# Altium PCB Rackmount_DSP.PcbDoc (part 6 of 24)
Units mil, origin at the board's own origin, x right, y up, seen from the top; angles counter-clockwise.
Board outline 10629.92 x 8267.72 mil, 4 copper layers (Top Layer, Mid Layer 1, Mid Layer 2, Bottom Layer), stack 36.2 mil thick; 4500 components, 1565 nets, 9765 pads, 3289 vias.
Unrouted connection lines stored in the file: 1.
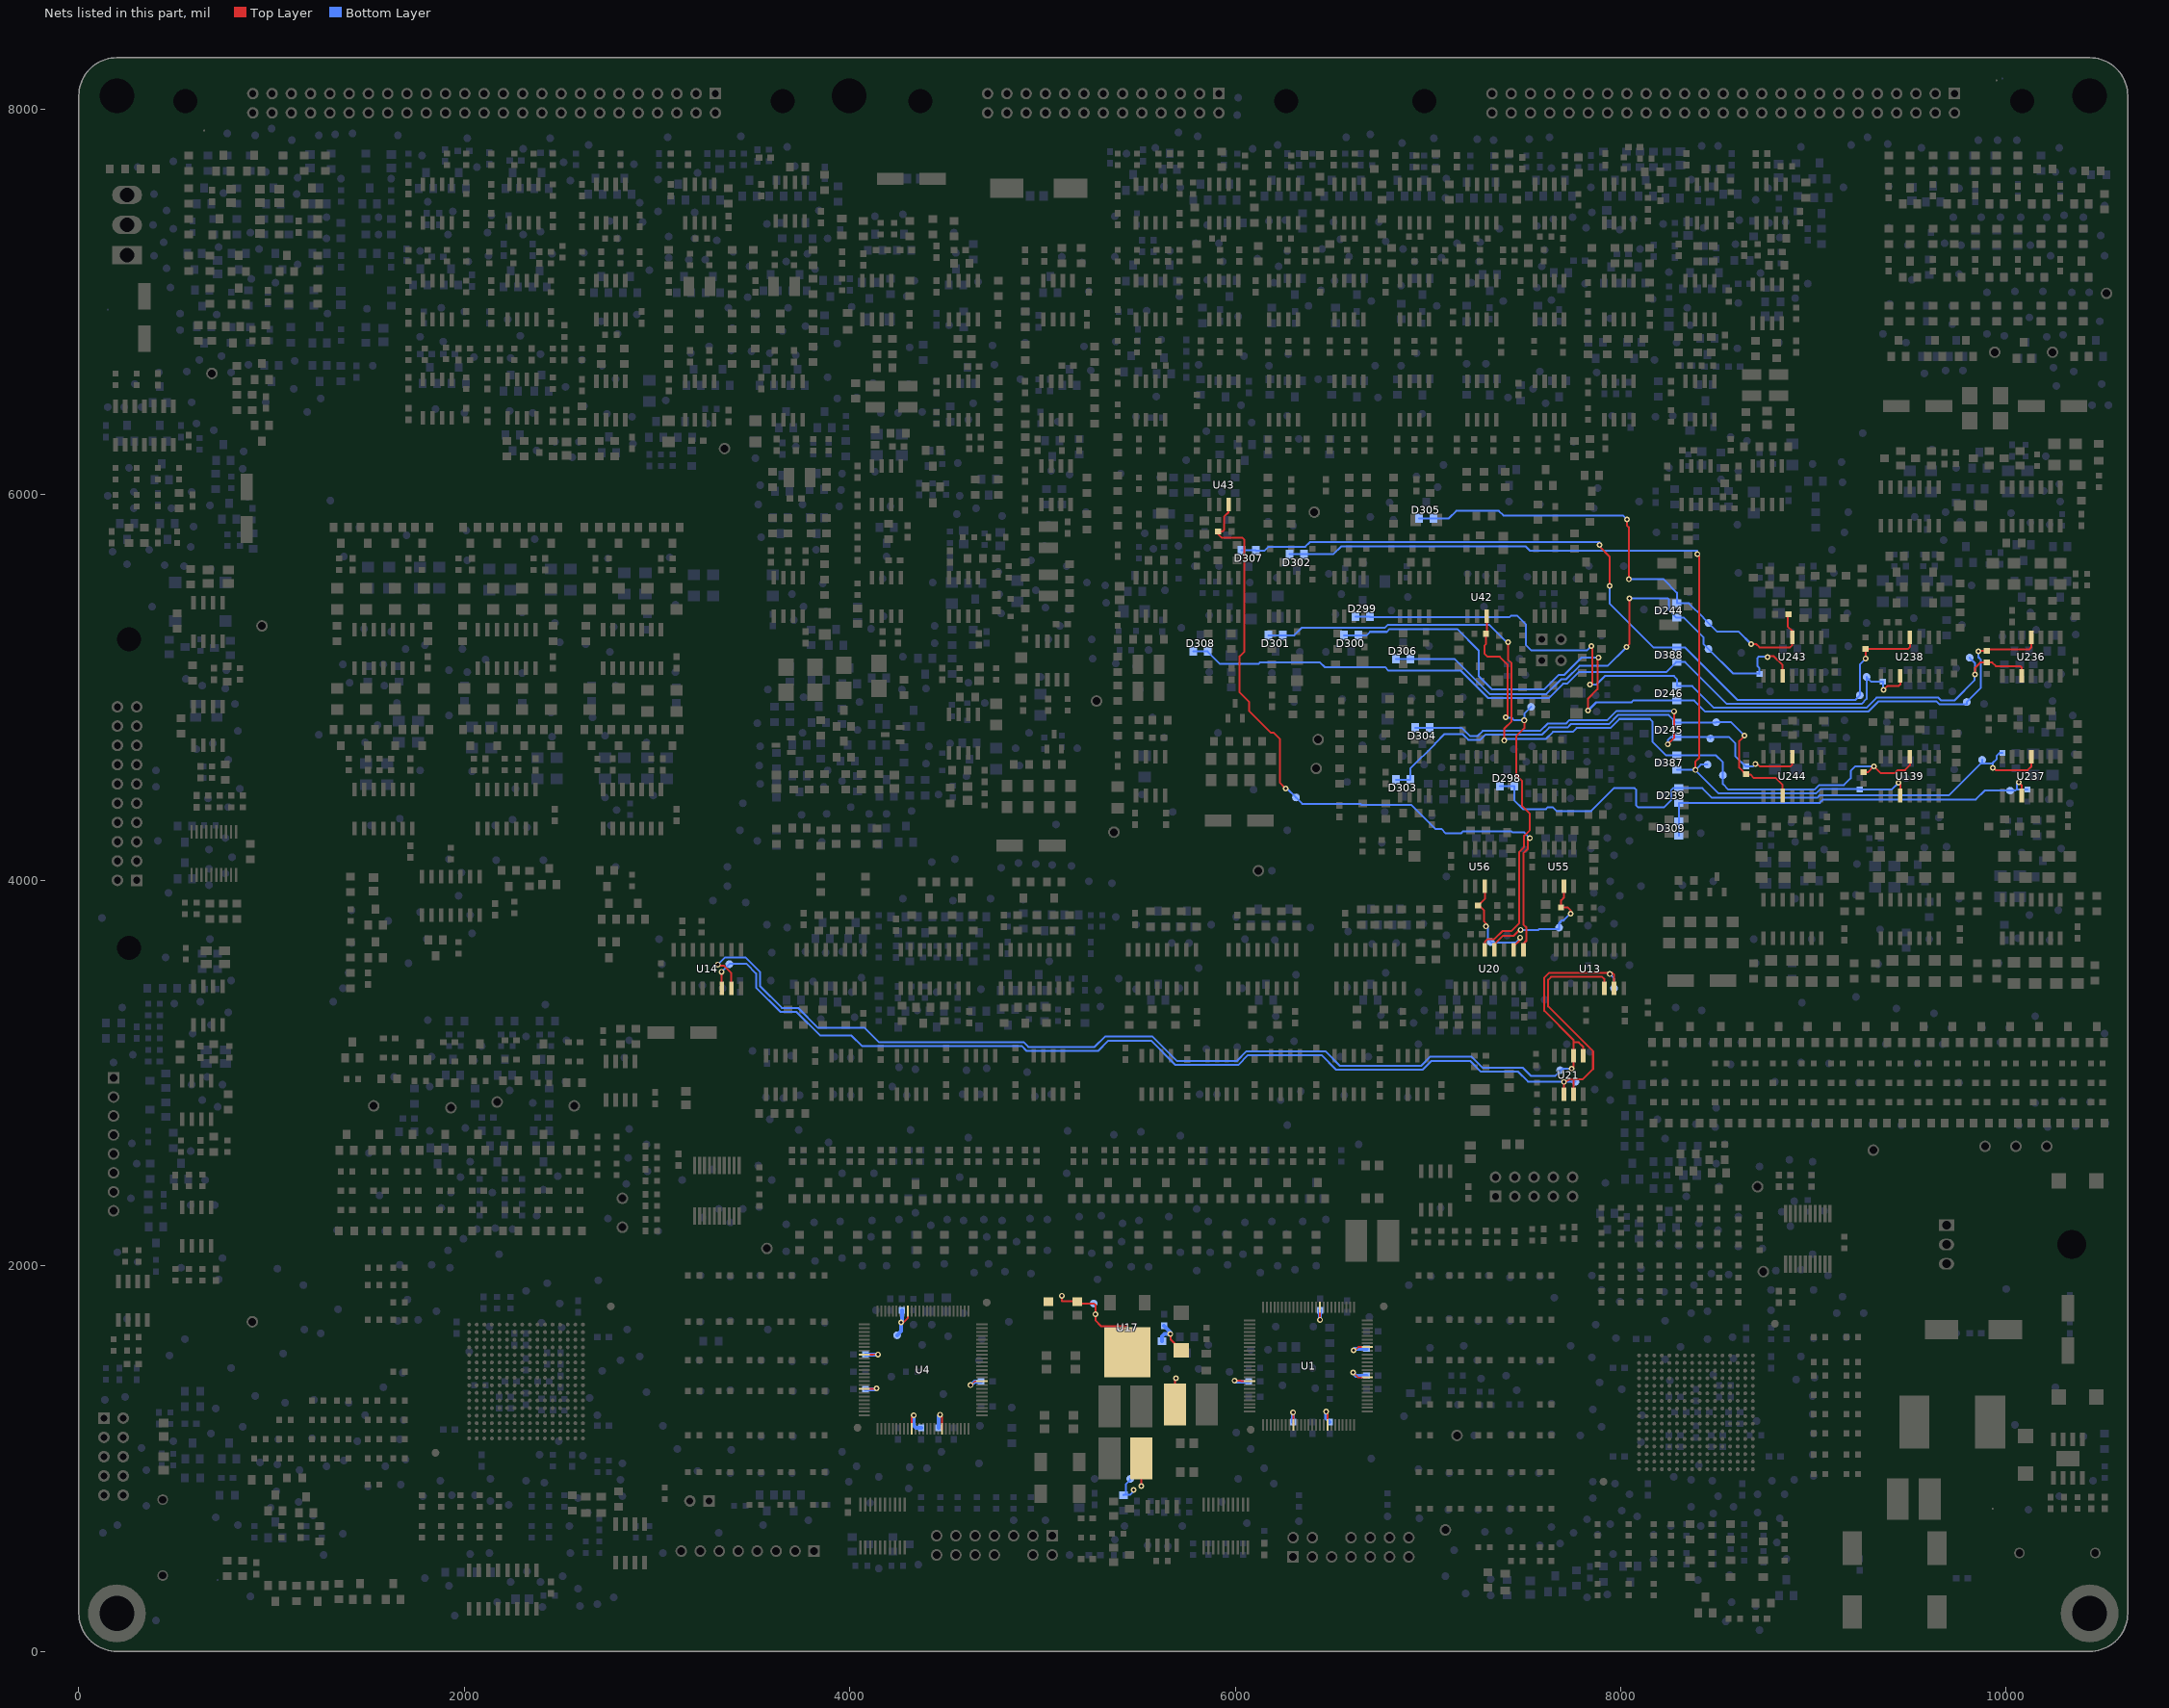
[diagram p8: the nets of this part, all layers, seen from the top]

## Part data
C1 C3 C4 C5 C6 C7 C8 C11 C13 C14 C507 C508 C509 C510 C511 C512 C513 C515 C516 C517 C518 C829 C830 C1062 C1063 C1064 C1065 C1066 C1067 C1068 C1069 C1070 C1071 C1072 C1073 C1077 C1078 C1079: ".001uF"
C17 C18 C19 C38 C330 C331 C332 C333 C334 C335 C336 C337 C338 C907 C917 C918 C955 C956 R2088 R2089: "10uF"
C20 C21 C339 C340: "2.2uF"
C22 C23 C24 C25 C27 C28 C29 C30 C31 C32 C33 C34 C35 C36 C37 C220 C224 C225 C226 C227 C228 C229 C230 C231 C232 C238 C239 C242 C243 C244 C245 C246 C248 C249 C250 C253 C255 C256 C257 C259 C260 C261 C262 C263 C264 C265 C266 C267 C268 C269 C270 C271 C272 C273 C274 C275 C279 C280 C281 C282 C284 C285 C286 C287 C289 C290 C291 C292 C293 C295 C297 C298 C299 C300 C301 C303 C304 C305 C306 C307 C308 C309 C310 C311 C312 C514 C520 C521 C522 C523 C524 C525 C526 C527 C528 C529 C530 C531 C535 C536 C537 C538 C539 C540 C541 C542 C543 C544 C545 C546 C547 C548 C549 C553 C554 C555 C556 C557 C558 C559 C560 C561 C566 C568 C571 C572 C573 C574 C576 C578 C583 C584 C585 C590 C604 C605 C606 C607 C608 C609 C610 C611 C612 C613 C614 C615 C617 C618 C619 C620 C621 C622 C623 C624 C625 C626 C627 C629 C630 C631 C632 C633 C634 C635 C636 C637 C639 C640 C641 C642 C643 C644 C645 C646 C647 C648 C649 C651 C654 C656 C657 C658 C659 C660 C661 C662 C663 C664 C665 C666 C667 C668 C669 C671 C672 C674 C675 C676 C677 C678 C679 C681 C692 C695 C704 C707 C727 C728 C730 C731 C733 C734 C735 C736 C737 C738 C740 C741 C743 C744 C745 C746 C747 C748 C750 C876 C877 C880 C881 C882 C883 C885 C886 C896 C897 C928 C929 C937 C938 C939 C940 C941 C945 C965 C966 C967 C968 C969 C970 C971 C972 C973 C974 C975 C976 C977 C978 C979 C980 C981 C982 C983 C984 C985 C986 C987 C988 C989 C990 C991 C992 C993 C994 C995 C996 C997 C998 C999 C1000 C1001 C1002 C1003 C1004 C1005 C1006 C1007 C1008 C1009 C1010 C1011 C1012 C1013 C1015 C1016 C1017 C1018 C1019 C1020 C1021 C1022 C1023 C1024 C1025 C1026 C1027 C1028 C1029 C1030 C1031 C1032 C1033 C1034 C1035 C1036 C1037 C1038 C1039 C1040 C1041 C1080 C1081 C1082 C1083 C1100 C1103 C1104 C1105 C1106 C1107 C1108 C1109 C1110 C1112 C1113 C1114 C1115 C1148 C1149 C1150 C1151 C1152 C1153 C1154 C1155 C1156 C1157 C1176 C1177: ".1uF"
C219 C313 C314 C315 C316 C317 C318 C319 C320 C321 C322 C323 C324 C326 C327 C328 C759 C1074 C1075 C1076: ".0033uF"
C241 C445 C446 C447 C448 C449 C450 C451 C452 C453 C454 C455 C456 C469 C470 C471 C478 C479 C480 C481 C482 C483 C484 C485 C486 C487 C488 C489 C490 C498 C783 C784 C785 C786 C787 C798 C799 C832 C833 C834 C835 C836 C837 C838 C839 C840 C841 C842 C843 C844 C845 C846 C847 C848 C849 C850 C851 C852 C853 C854 C855 C856 C857 C858 C859 C1050 C1051 C1052 C1174 C1175: ".01uF"
C325 C329: ".033uF"
C341 C342 C343 C344 C345 C346 C347 C348 C349 C350 C351 C352 C353 C354 C355 C356 C357 C358 C359 C360 C362 C363 C364 C368 C369 C370 C374 C375 C376 C377 C402 C403 C404 C405 C406 C407 C408 C409 C410 C411 C413 C414 C415 C416 C417 C418 C419 C420 C421 C422 C423 C424 C425 C426 C429 C430 C431 C432 C433 C434 C435 C436 C438 C439 C440 C441 C800 C801 C1043 C1084 C1101 C1116 C1117 C1118 C1119 C1120 C1121 C1122 C1123 C1124 C1125 C1126 C1127 C1128 C1129 C1130 C1131 C1132 C1158 C1159 C1160 C1161 C1162 C1163 C1164 C1165 C1166 C1167 C1168 C1169 C1170 C1171 C1172 C1173 C1178 C1200 C1201 C1202 C1203 C1204 C1205 C1206 C1207 C1208 C1209 C1210 C1211 C1212 C1213 C1214 C1215 C1216 C1217 C1218 C1219 C1220 C1221 C1222 C1223 C1224 C1225 C1226 C1227 C1228 C1229 C1230 C1231 C1232 C1233 C1234 C1235 C1236 C1237 C1238 C1239 C1240 C1241 C1242 C1243 C1244 C1245 C1246 C1247 C1248 C1249 C1250: "100pF"
C361 C427 C428: ".0022uF"
C365 C366 C367 C371 C372 C373 C1044 C1045 C1046: "68pF"
C384 C1047 C1048 C1049 C1054 C1055 C1056 C1057 C1058 C1059 C1060 C1061 C1085 C1086 C1087 C1088 C1089 C1090 C1091 C1092 C1093 C1094 C1095 C1096 C1097 C1098 C1099: "10pF"
C761 C762 C763 C764 C765 C766 C767 C768 C769 C770 C771 C806 C807 C808 C809 C810 C811 C812 C816 C817 C818 C819 C820 C821 C822 C823 C824 C825 C953 C1053 C1133 C1134 C1135 C1136 C1137 C1138 R2087: "1uF"
C772 C773: ".47uF"
C778 C911 C912 C916 C942 C943 C944 C954 C1111: "100uF"
C788 C789 C790 C791 C792 C793 C794 C795 C796 C797 C802 C803: "220pF"
C826 C827 C828: ".22uF"
C919: "33uF"
C1139 C1140 C1141: "22pF"
C1142 C1143: ".0047uF"
C1144 C1145 C1146 C1147: "220uF"
D400 D401 D402 D403 D404 D405: "100V,0.2A"
L1 L3 L4 L5 L6: "10uH"
L10: "22uH"
L11: "450uH"
R1 R2 R3 R4 R5 R6 R7 R8 R9 R10 R11 R12 R13 R14 R15 R16 R606 R607 R608 R609 R610 R611 R612 R613 R614 R615 R616 R617 R618 R619 R620 R621 R622 R623 R624 R625: "10ohms"
R17 R626: "22Kohms"
R19 R20 R21 R22 R23 R24 R25 R73 R627 R628 R629 R630 R631 R632 R633 R634 R638 R643 R644 R645 R646 R647 R648 R649 R650 R651 R652 R653 R654 R661 R662 R663 R664 R665 R666 R667 R668 R669 R670 R671 R672 R673 R674 R675 R678 R679 R681 R682 R683 R684 R685 R686 R687 R688 R689 R691 R692 R693 R694 R703 R704 R705 R708 R709 R710 R711 R712 R714 R715 R716 R717 R718 R719 R720 R721 R722 R723 R724 R725 R727 R731 R732 R739 R740 R741 R743 R744 R745 R746 R747 R748 R749 R750 R751 R752 R753 R754 R755 R756 R757 R758 R759 R1078 R1081 R1097 R1098 R1099 R1225 R1226 R1227 R1231 R1232 R1233 R1234 R1235 R1236 R1237 R1238 R1239 R1240 R1241 R1242 R1243 R1244 R1245 R1246 R1247 R1248 R1249 R1250 R1251 R1252 R1253 R1254 R1255 R1256 R1257 R1262 R1263 R1264 R1265 R1266 R1267 R1268 R1269 R1272 R1274 R1276 R1277 R1278 R1279 R1280 R1281 R1282 R1283 R1285 R1290 R1291 R1292 R1299 R1301 R1302 R1956 R1957 R1958 R1959 R1960 R1961 R1962 R1963 R1964 R1965 R1966 R1967 R1968 R1969 R2092 R2093 R2098 R2208 R2209 R2210 R2211 R2212 R2213 R2214 R2215 R2216 R2217 R2218 R2219 R2220 R2221 R2222 R2223 R2224 R2225 R2227 R2228 R2265 R2266 R2267 R2380 R2381 R2382 R2415 R2416 R2502 R2503 R2542 R2543 R2544 R2545 R2546 R2648 R2649 R2720: "4.7Kohms"
R26 R27 R28 R29 R30 R31 R32 R33 R34 R35 R36 R37 R38 R39 R40 R41 R42 R43 R44 R45 R46 R47 R48 R49 R50 R51 R52 R53 R54 R55 R56 R57 R58 R59 R60 R71 R72 R74 R605 R660 R707 R760 R761 R762 R763 R764 R765 R766 R767 R768 R769 R770 R771 R772 R773 R774 R775 R776 R777 R778 R779 R780 R781 R782 R783 R784 R785 R786 R787 R788 R789 R790 R791 R792 R793 R794 R795 R796 R797 R798 R799 R800 R801 R804 R805 R808 R809 R812 R814 R815 R818 R819 R822 R823 R826 R828 R830 R831 R832 R833 R834 R835 R836 R837 R838 R839 R840 R841 R842 R843 R844 R846 R848 R849 R851 R852 R853 R854 R855 R856 R857 R858 R859 R860 R861 R871 R872 R873 R1354 R1355 R1356 R1357 R1358 R1359 R1360 R1361 R1362 R1363 R1364 R1365 R1366 R1367 R1369 R1370 R1371 R1372 R1373 R1374 R1375 R1376 R1377 R1378 R1380 R1381 R1382 R1383 R1384 R1385 R1386 R1387 R1388 R1389 R1390 R1391 R1393 R1394 R1395 R1396 R1397 R1398 R1399 R1401 R1403 R1404 R1405 R1406 R1412 R1413 R1414 R1415 R1416 R1417 R1420 R1422 R1423 R1436 R1438 R1448 R1449 R1450 R1451 R1452 R1454 R1455 R1456 R1457 R1459 R1460 R1461 R1464 R1465 R1468 R1474 R1475 R2037 R2038 R2099 R2100 R2101 R2102 R2103 R2104 R2105 R2106 R2107 R2108 R2109 R2110 R2229 R2275 R2276 R2277 R2278 R2279 R2280 R2281 R2285 R2371 R2372 R2373 R2408 R2504 R2505 R2506 R2507 R2522 R2523 R2524 R2525 R2526 R2527 R2528 R2529 R2530 R2531 R2532 R2533 R2534 R2535 R2536 R2551 R2552 R2553 R2554 R2555 R2556 R2557 R2562 R2563 R2564 R2565 R2650 R2651 R2652 R2653 R2654 R2655 R2656 R2657 R2658 R2659 R2660 R2661 R2662 R2663 R2664 R2665 R2666 R2725 R2732 R2733: "10Kohms"
R61 R62 R63 R874 R875 R876 R877 R878 R879 R880 R881 R882 R883 R884 R885 R886 R887 R1313 R1478 R1479 R1480 R1481 R2713 R2714 R2715: "330ohms"
R70 R936 R937 R938 R939 R940 R941 R942 R943 R944 R945 R946 R947 R960 R961 R962 R963 R964 R965 R970 R971 R972 R973 R974 R975 R976 R977 R978 R979 R980 R982 R983 R1970 R1971 R1972 R1973 R1974 R1975 R1976 R1977 R1978 R1979 R1980 R1981 R1982 R1983 R2112 R2113 R2114 R2115 R2116 R2117 R2118 R2119 R2120 R2121 R2122 R2123 R2413 R2500 R2501: "2.7Kohms"
R75 R989 R990 R991 R992 R993 R994 R995 R996 R997 R998 R999 R1000 R1001 R1002 R1003 R1004 R1005 R1006 R1007 R1008 R1009 R1010 R1011 R1012 R1013 R1014 R1015 R1016 R1017 R1018 R1019 R1020 R1021 R1031 R1032 R1033 R1034 R1035 R1036 R1037 R1038 R1039 R1040 R1041 R1042 R1043 R1044 R1045 R1046 R1047 R1049 R1050 R1051 R1052 R1053 R1054 R1055 R1056 R1057 R1058 R1059 R1060 R1061 R1062 R1063 R1064 R1065 R1066 R1067 R1068 R1069 R1070 R1071 R1072 R1073 R1074 R1075 R1076 R1111 R1112 R1113 R1114 R1115 R1118 R1119 R1120 R1121 R1122 R1123 R1124 R1125 R1126 R1127 R1128 R1129 R1130 R1131 R1132 R1133 R1136 R1139 R1140 R1143 R1144 R1145 R1146 R1147 R1148 R1149 R1150 R1151 R1152 R1153 R1154 R1155 R1156 R1157 R1158 R1159 R1160 R1161 R1162 R1163 R1164 R1165 R1166 R1167 R1168 R1169 R1170 R1171 R1172 R1176 R1177 R1181 R1182 R1189 R1190 R1191 R1192 R1193 R1194 R1195 R1196 R1197 R1198 R1199 R1200 R1201 R1202 R1203 R1204 R1205 R1206 R1207 R1208 R1209 R1210 R1211 R1212 R1213 R1214 R1215 R1216 R1217 R1218 R1219 R1220 R1221 R1222 R2199 R2200 R2201 R2202 R2203 R2204 R2205 R2206 R2537 R2538 R2539 R2540 R2541 R2647 R2728 R2729 R2730 R2731 R3006 R3007 R3008: "100ohms"
R680 R2232 R2234 R2236 R2237 R2238 R2239 R2240 R2241 R2242 R2243 R2244 R2245: "11Kohms"
R802 R803 R806 R807 R810 R811 R813 R816 R817 R820 R821 R824 R825 R827 R829 R845 R847 R850 R1604 R1605 R1606 R1607 R1774 R1775 R1776 R1777 R1778 R1779: "16Kohms"
R862 R863 R865 R866 R867 R869 R870 R1307 R1309 R1311 R1312 R1596 R1597 R1598 R1599 R1600 R1601 R2026 R2027 R2264 R2271 R2511 R2726 R2727 R2736: "1Kohms"
R864 R1077 R1079 R1080 R1082 R1083 R1084 R1085 R1086 R1087 R1088 R1093 R1095 R1096 R1100 R1101 R1102 R1103 R1104 R1105 R1106 R1107 R1108 R1109 R1110 R2094 R2095 R2096 R2097 R2343 R2344 R2347 R2348 R2349 R2350 R2351 R2352 R2353 R2354 R2414 R2667 R2668 R2669 R2670 R2671 R2672 R2673 R2674 R2675 R2676 R2677 R2678 R2679 R2680 R2681 R2682 R2683 R2684 R2685 R2686 R2687 R2688 R2689 R2690 R2691 R2692 R2693 R2694 R2695 R2696 R2697 R2698 R2699 R2700 R2701 R2702 R2703 R2704 R2705 R2706 R2707 R2708: "2Kohms"
R888 R889 R890 R903 R904 R905 R906 R907 R908 R909 R910 R911 R912 R914 R915 R916 R917 R918 R919 R920 R921 R922 R923 R924 R925 R927 R928 R929 R930 R931 R932 R933: "200ohms"
R891 R892 R893 R894 R895 R896 R897 R898 R899 R900 R901 R902 R913 R926 R2111 R2709 R2710 R2711 R2712 R3011 R3012 R3013 R3014: "33ohms"
R984 R988 R1350 R1351 R1352 R1353 R2069 R2516 R2518 R2519 R2716 R2717 R2718 R2719 R3009 R3010 R3015 R3016: "0ohms"
R1048 R1608 R1611 R1612 R1613 R1614 R1615 R1616 R1617 R1618 R1619 R1620 R1621 R1622 R1627 R1628 R1629 R1630 R1631 R1632 R1633 R1634 R1635 R1636 R1637 R1638 R1639 R1640 R1641 R1642 R1643 R1644 R1645 R1646 R1658 R2336 R2337 R2338 R2339 R2340 R2341 R2510 R2512 R2513 R2644 R2645 R2646 R2734 R2735: "1Mohms"
R1314 R1315 R1316 R1317 R1948 R1949 R1950 R1951 R1952 R1953 R1954 R1955 R1987 R1988 R1989 R1990 R2324 R2325 R2326 R2327 R2328 R2329 R2330 R2331 R2332 R2333 R2334 R2335 R2566 R2567 R2568 R2569 R2570 R2571 R2572 R2573: "27Kohms"
R1318 R1319 R1320 R1497 R1498 R1499 R1500 R1501 R1502 R1503 R1522 R1523 R1535 R1536 R1537 R1538 R1546 R1547 R1548 R1549 R1564 R1567 R1568 R1569 R1570 R1571 R1575 R1576 R1577 R1578 R1579 R1668 R1669 R1670 R1671 R1672 R1674 R1675 R1676 R1677 R1678 R1679 R1680 R1681 R1682 R1683 R1684 R1685 R1686 R1687 R1690 R1691 R1692 R1694 R1695 R1696 R2230 R2231 R2233 R2235 R2246 R2247 R2248 R2249 R2250 R2251 R2252 R2253 R2254 R2255 R2256 R2257 R2258 R2259 R2260 R2261 R2262 R2263 R2268 R2269 R2270 R2272 R2273 R2274 R2547 R2548 R2549 R2550: "20Kohms"
R1345: "62Kohms"
R1346 R1348 R1349 R2621 R2622 R2623 R2624 R2625 R2626 R2627 R2628 R2629: "510ohms"
R1402: "30Kohms"
R1424 R1425 R1426 R1427 R1428 R1429 R1430 R1432 R1433 R1434 R1439 R1440 R1441 R1442 R1443 R1444 R1445 R1446 R1447 R1492 R1493 R1494 R1602 R1603 R1812 R1813 R1814 R2054 R2055 R2056 R2078 R2289 R2499: "15Kohms"
R1453 R1458 R1864 R1865 R1866 R1867 R1868 R1869 R1870 R1871 R1872 R1873 R1874 R1875 R1876 R1877 R1878 R1879 R1882 R1896 R1897 R1898 R1899 R1900 R1901 R1902 R1903 R1904 R1905 R1906 R1907 R1908 R1909 R1910 R1911 R1912 R1913 R1914 R1915 R1916 R1919 R1920 R1921 R1924 R2313 R2314 R2315 R2316 R2317 R2318 R2319 R2320 R2321 R2322: "3.3Kohms"
R1482 R1483 R1484 R1485 R1486 R1487 R1488 R1489 R1490 R1491 R2521: "47Kohms"
R1623 R1624 R1647 R1648 R1649 R1650 R1651 R1652 R1653 R1654 R1655 R1656 R2592 R2593 R2594 R2595 R2596 R2597 R2598 R2599 R2600 R2601 R2602 R2603 R2604 R2605 R2606 R2607 R2608: "10Mohms"
R1661: "5.6Kohms"
R1697: "63.4Kohms"
R1701 R1719 R1723 R1724 R1728 R1743 R1841 R1842 R1843 R1844 R1845 R1846 R1847 R1848 R1849 R1850 R1851 R1852 R2063 R2064 R2065 R2066 R2067 R2068 R2294 R2295 R2296 R2297 R2298 R2299 R2300 R2301 R2302 R2303 R2304 R2305 R2306 R2307 R2308 R2309 R2310 R2311 R2312 R2342 R2508 R2509 R2558 R2559 R2560 R2561 R2609 R2610 R2611: "51Kohms"
R1819 R1820 R1821 R1822 R1823 R1824 R1825 R1826 R1827 R1828 R1829 R1830 R1831 R1832 R1833 R1834 R1835 R1836 R1837 R1838 R1839 R1840 R1946 R2323 R2355 R2356: "100Kohms"
R1853 R1854 R1855 R1856 R1857 R1858: "470Kohms"
R1859 R1860 R1861: "39Kohms"
R1938: "18Kohms"
R2041 R2042 R2043 R2396 R2397 R2398 R2399 R2404 R2405 R2406 R2407 R2409: "75Kohms"
R2081 R2082 R2377 R2378: "820Kohms"
R2083: "300Kohms"
R2287 R2288 R2290 R2291 R2292 R2293: "25.5Kohms"
R2374 R2375 R2376: "7.5Kohms"
R2379 R3000 R3001 R3002: "24Kohms"
R2383: "240Kohms"
R2384 R2385 R2386 R2387 R2388 R2389 R2390 R2391 R2392 R2393 R2394 R2395: "160Kohms"
R2520: "6.2Kohms"
R2574 R2575 R2576 R2577 R2578 R2579 R2580 R2581 R2582: "3.01Kohms"
R2583 R2584 R2585 R2586 R2587 R2588 R2589 R2590 R2591: "750ohms"
R2612 R2613 R2614 R2615 R2616 R2617 R2618 R2619 R2620: "820ohms"
R2721 R2722 R2723 R2724: "1.5Kohms"
R3003 R3004 R3005: "150Kohms"
U7 U9 U27 U163 U164: "AZ431AN"
U17: "LM1117-1.8"
Y1: "20MHz"

## Free pads (board coordinates)
  round 10 smd far side paste-5.5 mask-5.5: ""(150,6960) ""(720,370) ""(9980,8160)
  round 300 hole 180 paste-5000 mask+2.5: ""(196.85,196.85) ""(10433.07,196.85)
  round 140 hole 180 unplated paste-5000 mask+22.5: ""(196.85,8070.87) ""(3996.06,8070.87) ""(10433.07,8070.87)
  round 10 smd paste-5.5 mask-5.5: ""(650,7890) ""(9930,740) ""(9950,8150)
  round 40 smd paste+0 mask+20: ""(1850,1030) ""(2760,1790) ""(4040,1160) ""(4710,1810) ""(6080,1150) ""(6770,1790) ""(7910,880) ""(8800,1700)

## Via types
v1: diameter 30, hole 16, Top Layer to Bottom Layer, 3143 vias
v2: diameter 22, hole 12, Top Layer to Bottom Layer, 146 vias

## Nets (pads, with @x,y where several pads share a name; then routed paths per layer and width w, separated by ;. In a path a pad name is that pad's centre, name@x,y a point inside that pad or via, vN(x,y) a via of type N, cw(c..) or ccw(c..) an arc to the next point about the centre after c; other vN are vias at no path point)
1REC_OC_A+: D246.2 D300.1 D300.2 R1829.2 TP142.1 U236.4 | length 4594.2
  Top Layer w10: v1(7830,4880.64) 7830,4941.85 7879.49,4991.34 7879.49,5150.75 v1(7883.74,5155) ; v1(9855.48,5188.05) 9857.43,5190 R1829.2@9900,5190 9900,5197.42 10119.22,5197.42 10130,5208.2 U236.4@10130,5260
  Bottom Layer w10: D300.1@6562.5,5271.5 D300.2@6637.5,5271.5 6681.81,5271.5 6699.44,5289.13 6786.6,5289.13 6800.6,5303.13 7151.46,5303.13 7262.98,5191.62 7262.98,5060.38 7332.94,4990.42 7601.97,4990.42 7676.62,5065.07 7705.03,5065.07 7794.96,5155 v1(7883.74,5155) ; v1(7830,4880.64) 7830,4880.76 7872.37,4923.13 8055.06,4923.13 8064.43,4932.5 D246.2@8291.5,4932.5 8381.07,4932.5 8438.21,4875.36 9283.5,4875.36 9335.82,4927.68 9638.85,4927.68 9653.98,4912.55 9795,4912.55 TP142.1@9795,4925 9868.74,4998.73 9868.74,5144.79 9855.48,5158.05 v1(9855.48,5188.05)
1REC_OC_A-: D246.1 D299.1 D299.2 R1830.2 TP141.1 U236.10 | length 4245.7
  Top Layer w10: v1(7840.53,5015.51) 7853.53,5015.51 7853.53,5215.51 v1(7847.2,5215.51) ; v1(9837.84,5067.84) 9837.84,5102.54 9865.29,5130 R1830.2@9900,5130 9927.1,5130 9946.28,5110.82 10073.68,5110.82 10079.1,5105.4 10079.1,5060 U236.10@10080,5060
  Bottom Layer w10: D299.2@6622.5,5368.5 D299.1@6697.5,5368.5 6697.5,5365 7422.6,5365 7430.07,5372.47 7463.51,5372.47 7508.75,5327.23 7508.75,5219.5 7536.08,5192.16 7823.86,5192.16 v1(7847.2,5215.51) ; v1(7840.53,5015.51) 7873.3,5015.51 7917.29,5059.51 8276.33,5059.51 8291.5,5044.34 D246.1@8291.5,5007.5 8370.98,5007.5 8483.11,4895.36 9273.91,4895.36 9326.23,4947.68 9648.03,4947.68 9662.55,4933.16 9731.31,4933.16 9836.49,5038.34 9836.49,5066.49 v1(9837.84,5067.84) 9837.84,5127.16 TP141.1@9810,5155
1REC_OC_B+: D239.2 D309.1 D309.2 R1831.2 TP140.1 U237.10 | length 2129.5
  Top Layer w10: v1(10065,4508.03) 10080,4493.03 U237.10@10080,4440
  Bottom Layer w10: D309.2@8301.5,4232.5 D309.1@8301.5,4307.5 D239.2@8301.5,4402.5 9032.99,4402.5 9050.49,4420 9842.68,4420 9887.68,4465 TP140.1@10020,4465 10046.36,4465 10056.3,4474.94 ; v1(10065,4508.03) 10056.3,4508.03 10056.3,4474.94 ; R1831.2@10110,4470 10056.3,4470 10056.3,4474.94
1REC_OC_B-: D239.1 D298.1 D298.2 R1832.2 TP139.1 U237.4 | length 3354.9
  Top Layer w10: v1(9930.27,4584.16) 9932.1,4585.99 9945.91,4572.18 10112.18,4572.18 10130,4590 U237.4@10130,4640
  Bottom Layer w10: D298.2@7372.5,4488.5 D298.1@7447.5,4488.5 7447.5,4414.5 7492.64,4369.36 7611.46,4369.36 7622.1,4380 7646.95,4380 7666.93,4360.03 7846.48,4360.03 7963.96,4477.5 8071.65,4477.5 8080.12,4469.02 8080.12,4388.4 8090.63,4377.89 8223.11,4377.89 8261.03,4415.81 8261.03,4467.33 8271.2,4477.5 D239.1@8301.5,4477.5 8423.54,4477.5 8473.04,4427.99 9019.06,4427.99 9031.07,4440 9701.92,4440 9866.89,4604.97 9875,4604.97 ; TP139.1@9875,4625 9875,4604.97 ; v1(9930.27,4584.16) 9930.27,4604.97 ; R1832.2@9980,4660 9964.2,4660 9951.42,4647.21 9951.42,4630.39 9930.27,4609.25 9930.27,4604.97 ; 9875,4604.97 9930.27,4604.97
1REC_OC_C+: D308.1 D308.2 D388.2 R1837.2 TP138.1 U238.10 | length 4173.2
  Top Layer w10: v1(9363.67,4988.66) 9383.98,5008.97 9442.45,5008.97 9450,5016.52 U238.10@9450,5060
  Bottom Layer w10: D308.2@5782.5,5188.5 D308.1@5857.5,5188.5 5857.5,5185 5920,5122.5 6119.26,5122.5 6126.93,5130.17 6439.5,5130.17 6463.91,5105.77 6777.47,5105.77 6795.74,5087.5 7170.48,5087.5 7312.95,4945.03 7625.55,4945.03 7700.8,5020.27 7722.1,5020.27 7783.63,5081.8 8237.3,5081.8 8288,5132.5 D388.2@8291.5,5132.5 8333.15,5132.5 8550.29,4915.36 9248.76,4915.36 9275,4941.61 TP138.1@9275,5055 9300,5030 R1837.2@9360,5030 9360,4992.34 v1(9363.67,4988.66)
1REC_OC_C-: D307.1 D307.2 D388.1 R1838.2 TP137.1 U238.4 | length 4269.2
  Top Layer w10: v1(7890.16,5739.19) 7890.16,5731.61 7941.72,5680.05 v1(7941.72,5527.68) ; v1(9270,5150.02) R1838.2@9270,5200 9490,5200 9500,5210 U238.4@9500,5260
  Bottom Layer w10: D307.1@6032.5,5711.5 D307.2@6107.5,5711.5 6107.5,5710.55 6152.06,5710.55 6172.4,5730.88 6362.72,5730.88 6386.5,5754.66 7890.16,5754.66 v1(7890.16,5739.19) ; v1(7941.72,5527.68) 7941.72,5436.71 8170.92,5207.5 D388.1@8291.5,5207.5 8334.51,5207.5 8606.65,4935.36 9215.88,4935.36 9240,4959.48 TP137.1@9240,4960 9240,5120.02 v1(9270,5150.02)
1st_PFC_I+_DISCHG: R1546.2 TP537.1 U20.5 U42.7 | length 2190.8
  Top Layer w10: U20.5@7295,3640 7295,3679.78 7310.22,3695 7343.59,3695 7385.26,3736.68 7431.64,3736.68 7471.71,3776.75 7471.71,4145.15 7498.73,4172.16 7498.73,4231.04 7527.92,4260.24 7527.92,4345.79 7486.78,4386.93 7486.78,4516.21 7459,4544 7459,4749.45 7499,4789.45 v1(7499,4830) ; U42.7@7305,5370 7305,5285.39 7300,5280.39 R1546.2@7300,5280 7300,5224.81 7292.04,5216.85 7292.04,5176.81 7309.55,5159.31 7372.43,5159.31 7411.63,5120.1 7411.63,4845.59 v1(7403.39,4845.59)
  Bottom Layer w10: v1(7403.39,4845.59) 7403.39,4843.63 7433.39,4843.63 7447.02,4830 v1(7499,4830) 7499,4864 TP537.1@7535,4900
1st_PFC_I-_DISCHG: R1547.2 TP1679.1 U20.1 U43.7 | length 3736.9
  Top Layer w10: R1547.2@5910,5810 R1547.2@5911,5810 ; U43.7@5965,5950 5965,5909.77 5942.89,5887.66 5942.89,5819.14 5933.75,5810 R1547.2@5911,5810 ; v1(6261.33,4476.21) 6231.2,4506.34 6231.2,4733.81 6198.22,4766.78 6183.65,4766.78 6072.5,4877.93 6072.5,4924.86 6022.05,4975.31 6022.05,5162.04 6047.5,5187.49 6047.5,5766.21 6037.46,5776.25 5931.22,5776.25 5911,5796.47 R1547.2@5911,5810 ; U20.1@7495,3640 7495,3671.72 7510.34,3687.06 7510.34,3755.37 7495,3770.71 7495,4140.15 7518.73,4163.88 7518.73,4209.12 7528.32,4218.71 v1(7528.82,4218.71)
  Bottom Layer w10: v1(6261.33,4476.21) 6268.79,4476.21 TP1679.1@6315,4430 6347.53,4397.47 6649.16,4397.47 6654.49,4392.14 6912.61,4392.14 7037.72,4267.04 7068.63,4267.04 7092.27,4243.4 7170.65,4243.4 7182.25,4255 7431.08,4255 7438.01,4248.06 7499.47,4248.06 v1(7528.82,4218.71)
2nd_PFC_I+_DISCHG: R2548.2 TP1680.1 U20.4 U55.7 | length 704.8
  Top Layer w10: U20.4@7345,3640 7345,3667.68 7390.19,3712.87 7445.17,3712.87 7475.25,3742.95 v1(7480.33,3742.95) ; R2548.2@7690,3860 R2548.2@7690.44,3860 ; U55.7@7705,3970 7705,3910.36 7690.44,3895.8 R2548.2@7690.44,3860 ; v1(7740.51,3827.5) 7740.51,3843.86 7724.37,3860 R2548.2@7690.44,3860
  Bottom Layer w10: v1(7480.33,3742.95) 7571.71,3742.95 7576,3747.25 7680,3747.25 TP1680.1@7680,3755 7680,3778.3 7687.63,3785.93 ; 7687.63,3778.3 7687.63,3785.93 ; v1(7740.51,3827.5) 7739.29,3827.5 7704.8,3793 7694.7,3793 7687.63,3785.93
2nd_PFC_I-_DISCHG: R2550.2 TP1681.1 U20.2 U56.7 | length 587.4
  Top Layer w10: R2550.2@7260,3870 R2550.2@7261,3870 ; U56.7@7295,3970 7295,3904 R2550.2@7261,3870 ; v1(7300.81,3761) 7304.12,3761 7304.12,3772.83 7291.13,3785.82 7291.13,3842.95 7264.09,3870 R2550.2@7261,3870 ; U20.2@7445,3640 7445,3657.82 7477.67,3690.49 v1(7477.67,3702.95)
  Bottom Layer w10: v1(7300.81,3761) 7311.61,3761 7311.61,3696.34 7325,3682.95 TP1681.1@7325,3680 7327.01,3677.99 7457.3,3677.99 7477.67,3698.37 v1(7477.67,3702.95)
2REC_OC_A+: D302.1 D302.2 D387.2 R1833.2 TP133.1 U139.10 | length 4663.8
  Top Layer w10: v1(8387.59,4572.5) 8387.59,4616.24 8407.5,4636.16 8407.5,5681.74 8400.02,5689.21 8398.42,5690.82 8398.42,5692.13 v1(8397.58,5692.13) ; v1(9440.61,4505.75) 9450,4496.36 U139.10@9450,4440
  Bottom Layer w10: D302.1@6282.5,5691.5 D302.2@6357.5,5691.5 6508.18,5691.5 6549.18,5732.5 7506.83,5732.5 7530.14,5709.19 8397.58,5709.19 v1(8397.58,5692.13) ; D387.2@8291.5,4572.5 v1(8387.59,4572.5) ; TP133.1@8450,4600 8415.09,4600 v1(8387.59,4572.5) ; v1(9440.61,4505.75) 9404.87,4470 R1833.2@9240,4470 9240,4474.18 9036.96,4474.18 9013.54,4450.76 8507.77,4450.76 8387.59,4570.94 v1(8387.59,4572.5)
2REC_OC_A-: D301.1 D301.2 D387.1 R1834.2 TP132.1 U139.4 | length 4491.6
  Top Layer w10: v1(7395.37,4724.79) 7395.37,4787.16 7433.39,4825.19 7433.39,4997.67 7431.63,4999.43 7431.63,5128.39 7414.94,5145.08 7414.94,5228.9 7414.94,5234.51 v1(7415.19,5234.76) ; R1834.2@9260,4560 9281.66,4560 v1(9312.95,4591.28) 9347.37,4556.87 9421.3,4556.87 9436.29,4571.86 9475.49,4571.86 9500,4596.36 U139.4@9500,4640
  Bottom Layer w10: D301.1@6172.5,5271.5 D301.2@6247.5,5271.5 6305.38,5271.5 6343.88,5310 6775.57,5310 6790.46,5324.9 7318.94,5324.9 7414.94,5228.9 7415.19,5229.15 v1(7415.19,5234.76) ; v1(7395.37,4724.79) 7395.37,4733.5 7611.4,4733.5 7648.38,4770.48 7750.98,4770.48 7770.42,4789.92 7945.84,4789.92 7993.01,4837.09 8151.04,4837.09 8165,4823.13 8165,4717.85 8235.35,4647.5 D387.1@8291.5,4647.5 8494.38,4647.5 8530.37,4611.51 TP132.1@8530.37,4545 ; TP132.1@8530,4545 TP132.1@8530.37,4545 ; v1(9312.95,4591.28) 9216.62,4591.28 9192.48,4567.15 9192.48,4529.73 9157.6,4494.84 9116.31,4494.84 9115.87,4494.41 9028.9,4494.41 9005.25,4470.76 8777.57,4470.76 8558.72,4470.76 8530.37,4499.11 TP132.1@8530.37,4545
2REC_OC_B+: D244.2 D306.1 D306.2 R1827.2 TP131.1 U243.10 | length 2826.4
  Top Layer w10: v1(8030.26,5210.52) 8044.01,5224.27 v1(8044.01,5463.33) ; v1(8760.8,5158.43) 8760.8,5162.88 8792.86,5162.88 8840,5115.75 U243.10@8840,5060
  Bottom Layer w10: D306.2@6832.5,5148.5 D306.1@6907.5,5148.5 7137.86,5148.5 7319.58,4966.78 7614.47,4966.78 7690.92,5043.24 7716.36,5043.24 7785.25,5112.13 7931.87,5112.13 v1(8030.26,5210.52) ; v1(8044.01,5463.33) 8243.47,5463.33 8250,5456.8 8250,5400.5 8288,5362.5 D244.2@8291.5,5362.5 8327.78,5362.5 8430.25,5260.03 8430.25,5224.75 TP131.1@8455,5200 8581.71,5073.29 R1827.2@8720,5073.29 ; R1827.2@8720,5070 R1827.2@8720,5073.29 ; v1(8760.8,5158.43) 8760.8,5159.81 8715.03,5159.81 8709.3,5154.07 8709.3,5110.7 8720,5100 R1827.2@8720,5073.29
2REC_OC_B-: D244.1 D305.1 D305.2 R1828.2 TP130.1 U243.4 | length 2634.5
  Top Layer w10: v1(8031.65,5871.95) 8031.65,5841.95 8041.72,5831.89 v1(8041.72,5561.48) ; v1(8676.61,5225.46) 8702.87,5225.46 8719.9,5208.43 8720.27,5208.8 8878.61,5208.8 8890,5220.19 U243.4@8890,5260 8890,5293.26 8865.9,5317.36 8865.9,5380 R1828.2@8870,5380
  Bottom Layer w10: D305.2@6952.5,5878.5 D305.1@7027.5,5878.5 7108.03,5878.5 7146.44,5916.91 7367.44,5916.91 7391.19,5893.17 8010.44,5893.17 v1(8031.65,5871.95) ; v1(8041.72,5561.48) 8222.19,5561.48 8291.5,5492.16 D244.1@8291.5,5437.5 8353.96,5437.5 8430.25,5361.21 8430.25,5359.75 TP130.1@8455,5335 8500,5290 8612.07,5290 v1(8676.61,5225.46)
2REC_OC_C+: D245.2 D304.1 D304.2 R1835.2 TP129.1 U244.4 | length 2436.1
  Top Layer w10: v1(8243.69,4705.82) 8275.79,4737.92 v1(8275.79,4876.64) ; v1(8698.19,4602.9) 8708.83,4602.9 8721.72,4590 8879.95,4590 8890,4600.05 U244.4@8890,4640
  Bottom Layer w10: D304.1@6932.5,4791.5 D304.2@7007.5,4791.5 7175.11,4791.5 7217.36,4749.24 7258.01,4749.24 7283.55,4774.79 7581.74,4774.79 7620.15,4813.19 7714.94,4813.19 7731.75,4830 7929.35,4830 7976.44,4877.09 8275.79,4877.09 v1(8275.79,4876.64) ; v1(8243.69,4705.82) 8243.69,4726.58 8259.61,4742.5 D245.2@8291.5,4742.5 TP129.1@8465,4742.5 ; TP129.1@8465,4735 TP129.1@8465,4742.5 ; v1(8698.19,4602.9) 8685.29,4590 R1835.2@8650,4590 8649,4590 8593.68,4645.32 8593.68,4711.32 8562.5,4742.5 TP129.1@8465,4742.5
2REC_OC_C-: D245.1 D303.1 D303.2 R1826.2 TP128.1 U244.10 | length 2550.2
  Top Layer w10: v1(8642.12,4750.38) 8614.79,4723.06 8614.79,4584.21 8649,4550 R1826.2@8650,4550 8650,4548.84 8672.16,4548.84 8690.24,4530.76 8804.53,4530.76 8840,4495.28 U244.10@8840,4440
  Bottom Layer w10: D303.1@6832.5,4521.5 D303.2@6907.5,4521.5 6907.5,4579.14 7035.89,4707.53 7035.89,4710.04 7084.36,4758.51 7179.82,4758.51 7209.08,4729.24 7271.68,4729.24 7297.22,4754.79 7590.03,4754.79 7628.43,4793.19 7723.23,4793.19 7740.03,4810 7937.64,4810 7984.73,4857.09 8248.41,4857.09 8288,4817.5 D245.1@8291.5,4817.5 8493.03,4817.5 8495,4819.47 TP128.1@8495,4820 8572.5,4820 v1(8642.12,4750.38)
+1.8V: C30.1 C31.1 C32.1 C33.1 C34.1 C35.1 C36.1 C37.1 C248.1 C249.1 C253.1 C255.1 C297.1 C336.1 C337.1 D4.2 L3.1 L4.1 R970.1 R1102.1 TP505.1 TP1730.1 TP1754.1 U1.10 U1.42 U1.59 U1.68 U1.85 U1.93 U4.10 U4.42 U4.59 U4.68 U4.85 U4.93 U17.4 | length 3117.7
  Top Layer w9: U4.68@4074.88,1361.57 4134.93,1361.57 v1(4137.92,1364.57) ; U4.59@4074.88,1538.74 4118.88,1538.74 4120.14,1540 v1(4145.82,1540) ; v1(4265.89,1706.11) 4277.57,1706.11 4301.26,1729.8 U4.42@4301.26,1765.12 ; U4.85@4320.94,1154.88 4320.94,1213.51 v1(4332.18,1224.75) ; v1(4468.13,1227.86) 4478.43,1217.56 U4.93@4478.43,1154.88 ; v1(4626.83,1380.63) 4627.92,1380.63 4648.23,1400.94 U4.10@4685.12,1400.94 ; v1(5995.61,1403.81) 6026.72,1403.81 6029.27,1401.26 6040,1401.26 U1.42@6074.88,1401.26 ; v1(6300,1239.98) 6301.26,1238.72 U1.59@6301.26,1174.88 ; U1.10@6439.06,1785.12 6439.06,1720.75 v1(6440,1719.81) ; v1(6470.92,1243.4) 6478.43,1235.9 U1.68@6478.43,1174.88 ; v1(6610.81,1446.38) 6634.58,1422.62 6635.87,1422.62 6637.54,1420.94 U1.85@6685.12,1420.94 ; v1(6613.54,1561.74) 6621.89,1561.74 6638.58,1578.43 U1.93@6685.12,1578.43
  Top Layer w10: v1(5099.62,1845) 5099.62,1815.63 5180,1815.63 C337.1@5180,1815 5180,1805 5266.94,1805 5274.01,1797.93 v1(5274.01,1748.68) 5274.01,1717.32 5305,1686.34 5440,1686.34 U17.4@5440,1551.34 ; v1(5512.68,857.93) L4.1@5512.68,1000 ; v1(5662.88,1646.71) 5665.79,1646.71 5665.79,1616.71 D4.2@5720,1562.5 ; L3.1@5687.32,1280 5687.32,1412.46 v1(5692.15,1417.29)
  Bottom Layer w10: v1(4626.83,1380.63) v1@4627.85,1380.63 ; TP1754.1@5265,1805 5274.01,1795.99 v1(5274.01,1748.68) ; R970.1@5420,810 5420,813.36 R970.1@5433,813.36 ; TP505.1@5455,895 5455,889.83 5433,867.83 R970.1@5433,813.36 ; v1(5471.87,837.37) 5469.14,837.37 5469.14,826.73 5455.78,813.36 R970.1@5433,813.36 ; v1(5662.88,1646.71) v1@5662.88,1655.62 ; v1@5995.61,1400 v1(5995.61,1403.81)
  Bottom Layer w20: C255.1@4080,1360 4133.35,1360 v1(4137.92,1364.57) ; C249.1@4080,1540 v1(4145.82,1540) ; TP1730.1@4245,1640 4265.89,1660.89 v1(4265.89,1706.11) 4270,1706.11 C37.1@4270,1770 ; v1(4332.18,1224.75) 4332.18,1221.59 4332.68,1221.09 4332.13,1220.53 4332.13,1172.25 4344.38,1160 C248.1@4370,1160 ; C253.1@4460,1160 4460,1219.74 v1(4468.13,1227.86) ; v1@4627.85,1380.63 4647.22,1400 C36.1@4680,1400 ; R1102.1@5620,1610 5620,1634.36 5632.35,1646.71 v1(5662.88,1646.71) ; C297.1@5630,1690 5630,1688.5 v1@5662.88,1655.62 ; v1@5995.61,1400 C34.1@6070,1400 ; C33.1@6300,1190 v1(6300,1239.98) ; v1(6440,1719.81) C35.1@6440,1770 ; v1(6470.92,1243.4) 6470.92,1209.08 C32.1@6490,1190 ; v1(6610.81,1446.38) 6627.19,1430 C31.1@6680,1430 ; v1(6613.54,1561.74) 6621.8,1570 C30.1@6680,1570
+1V_REF: TP326.1 TP1755.1 U13.14 U14.14 U21.6 U21.7 | length 6188.8
  Top Layer w10: U14.14@3335,3440 v1(3335,3525.66) ; U21.6@7705,2890 7705,2942.17 v1@7717.06,2954.22 ; v1(7705.08,2954.22) v1@7717.06,2954.22 ; U21.7@7755,2890 7755,2966.89 ; U13.14@7915,3440 7915,3487.11 7902.78,3499.33 7638.36,3499.33 7622.81,3483.78 7622.81,3346.11 7856.12,3112.79 7856.12,3021.34 7801.67,2966.89 7755,2966.89 ; v1@7717.06,2954.22 7730.66,2967.83 7755,2967.83 7755,2966.89
  Bottom Layer w10: v1(3335,3525.66) 3335.66,3525.66 TP326.1@3375,3565 3375.99,3565.99 3464.84,3565.99 3514.07,3516.76 3514.07,3443.93 3640.59,3317.41 3723.69,3317.41 3846.63,3194.46 4008.76,3194.46 4062.75,3140.47 4892.34,3140.47 4917.91,3114.9 5287.36,3114.9 5340.46,3168 5563.79,3168 5689.49,3042.3 6015.15,3042.3 6066.24,3093.39 6447.73,3093.39 6523.36,3017.76 6972.6,3017.76 7017.38,3062.54 7218.41,3062.54 7274.28,3006.67 7467.66,3006.67 7518.43,2955.9 7703.41,2955.9 v1(7705.08,2954.22) 7765,2954.22 TP1755.1@7765,2955
+2V_REF: TP325.1 TP1756.1 U13.15 U14.15 U21.1 U21.2 | length 6240.6
  Top Layer w10: v1(3315.31,3563.06) 3315.31,3557.78 3345.31,3557.78 3385,3518.09 U14.15@3385,3440 ; v1(7745.19,3022.2) 7755,3032 U21.2@7755,3090 7755,3159.22 7755.1,3159.22 ; U21.1@7805,3090 7805,3135.56 7781.34,3159.22 7755.1,3159.22 ; v1(7943.13,3513.84) v1@7943.13,3519.51 ; U13.15@7965,3440 7965,3511.5 7956.98,3519.51 v1@7943.13,3519.51 ; 7755.1,3159.22 7755.1,3171.1 7602.81,3323.4 7602.81,3495.2 7627.12,3519.51 v1@7943.13,3519.51
  Bottom Layer w10: v1(3315.31,3563.06) 3352.57,3600.32 3458.8,3600.32 3534.07,3525.05 3534.07,3452.22 3647.91,3338.38 3731.6,3338.38 3835.58,3234.39 4077.33,3234.39 4150.91,3160.81 4900.88,3160.81 4926.04,3135.65 5269.87,3135.65 5323.78,3189.57 5570.51,3189.57 5697.77,3062.3 6006.87,3062.3 6057.95,3113.39 6467.11,3113.39 6542.74,3037.76 6963.72,3037.76 7011.34,3085.38 7224.51,3085.38 7283.22,3026.67 7492.66,3026.67 7535.13,2984.2 7658.75,2984.2 TP1756.1@7689.55,3015 ; TP1756.1@7685,3015 TP1756.1@7689.55,3015 ; v1(7745.19,3022.2) 7696.75,3022.2 TP1756.1@7689.55,3015 ; v1(7943.13,3513.84) 7964.34,3492.62 7964.34,3485.01 7965,3484.35 TP325.1@7965,3440